# Altium PCB Handle.PcbDoc
Units mm, origin at the board's own origin, x right, y up, seen from the top; angles counter-clockwise.
Board outline 100.08 x 133.75 mm, 2 copper layers (Top Layer, Bottom Layer); 6 components, 129 nets, 30 pads, 0 vias.
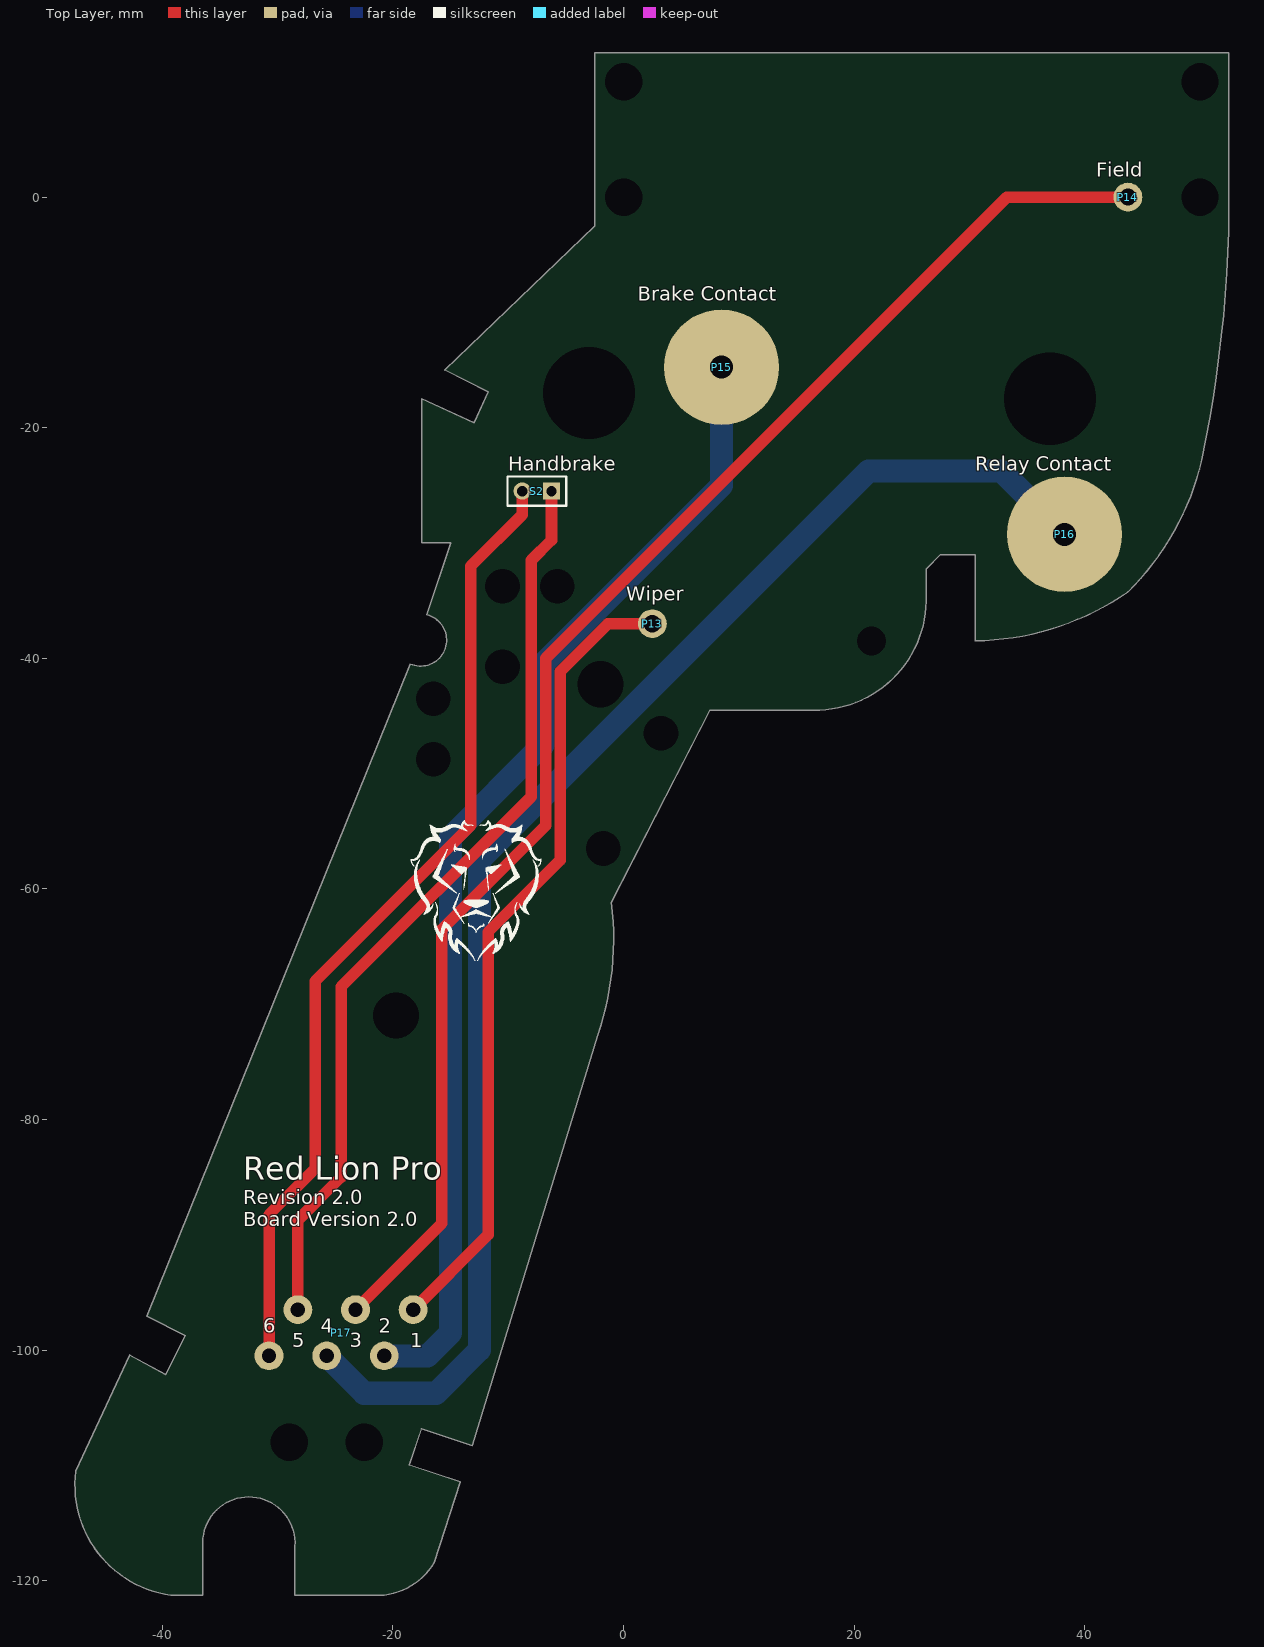
[diagram p0: Top Layer view]
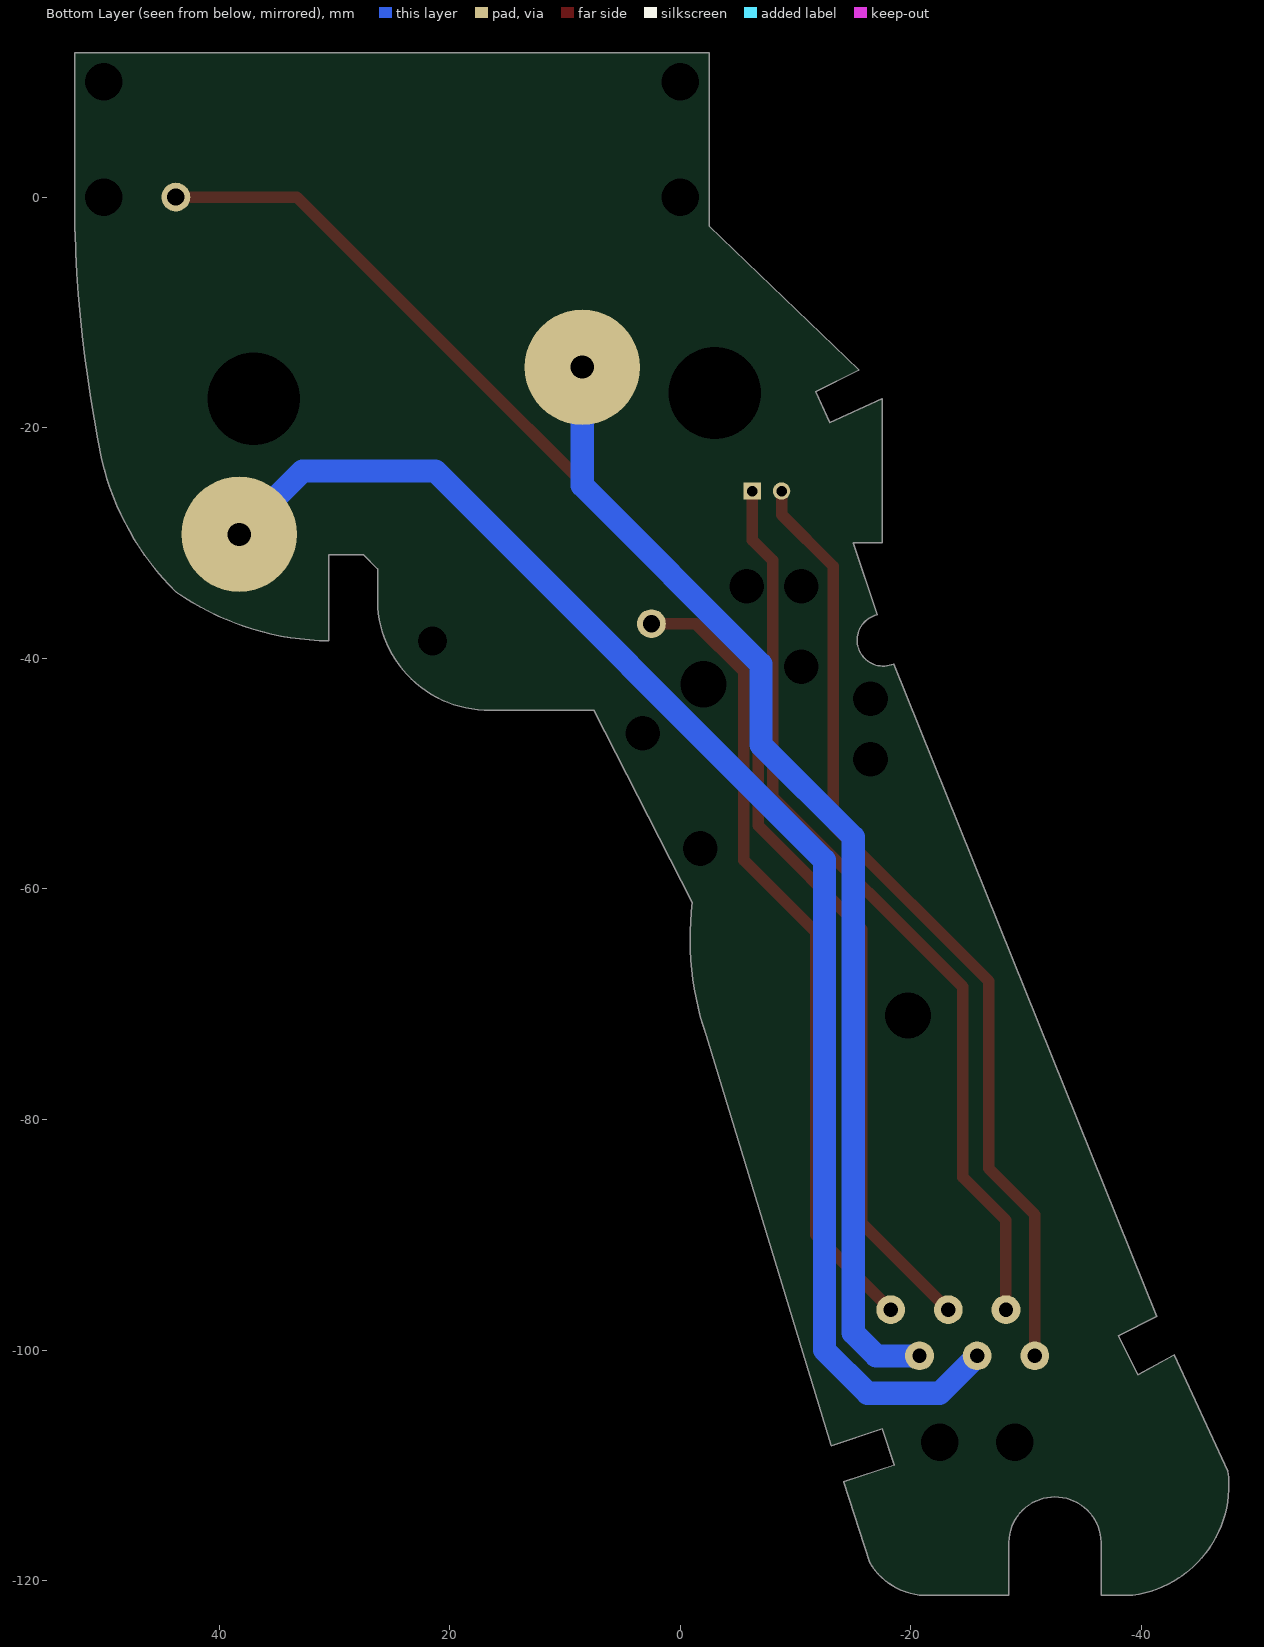
[diagram p1: Bottom Layer view, seen from below]

## Layer stack, top to bottom
Top Solder: solder mask 0.0102, Solder Resist, Dk 3.5
Top Layer: signal copper 0.0356
Dielectric 1: dielectric 0.32, FR-4, Dk 4.8
Bottom Layer: signal copper 0.0356
Bottom Solder: solder mask 0.0102, Solder Resist, Dk 3.5

## Board outline
-39.25,-121.25 -36.5,-121.25 -36.5,-117 cw(c-32.5,-116.75) -28.5,-117 -28.5,-121.25 -20.75,-121.25 ccw(c-21.421,-115.488) -16.421,-118.429 -14.167,-111.444 -18.575,-109.975 -17.525,-106.825 -13.111,-108.296 -2.234,-72.699 ccw(c-27.119,-64.323) -1.052,-61.178 7.5,-44.5 17,-44.5 ccw(c16.625,-34.875) 26.25,-34.5 26.25,-32.25 27.5,-31 30.5,-31 30.5,-38.5 ccw(c30.079,-14.408) 43.75,-34.25 ccw(c27.101,-17.417) 50.16,-22.789 ccw(c-62.76,0.581) 52.497,-2.992 52.5,-2.992 52.5,12.5 -2.5,12.5 -2.5,-2.5 -15.5,-15 -11.741,-16.88 -12.961,-19.563 -17.5,-17.5 -17.5,-30 -15,-30 -17.075,-36.225 cw(c-17.605,-38.423) -18.5,-40.5 -41.34,-97.08 -38,-98.75 -39.692,-102.135 -42.838,-100.432 -47.5,-110.5 ccw(c-38,-111.75)

## Design rules (kind name [scope] priority, off if disabled: settings)
Clearance [All] p1: gap=0.254
PolygonConnect [All] p1: connectstyle=Relief reliefconductorwidth=0.254 reliefentries=4 polygonreliefangle="90 Angle" airgapwidth=0.254
RoutingVias [All] p1: holewidth=0.711 width=1.27 viastyle="Through Hole" minholewidth=0.711 minwidth=1.27 maxholewidth=0.711 maxwidth=1.27
SolderMaskExpansion [All] p1: expansion=0.102
Width [All] p1: maxlimit=85 minlimit=0.01 preferedwidth=0.254
30 further rules are at their usual default settings.

## Classes and differential pairs
component class Handle: P13 P15 P16 P17 S2

## Components (designator, comment, footprint, x,y, rotation, side; value= is the part's Value field where it differs from the comment)
P13 "Wiper" 1Pin#1 2.5,-37 r0 top
P14 "Field" 1Pin#1 43.75,0 r0 top
P15 "Brake" 1Pin#2 7,-12.5 r0 top
P16 "Relay" 1Pin#3 39.5,-27.75 r0 top
P17 "Header 6" Interconnect -18.25,-96.5 r270 top
S2 "Full Stop" HDR1X2 -6.25,-25.5 r180 top

## Footprints (in the part's own frame and the unit in brackets; to place one, negate y for a bottom-side part, rotate by r counter-clockwise, add the part's x,y. Pads: shape width x height; smd on the part's side, far side on the other; paste and mask are expansions set on the pad)
1Pin#1 [mm]
  round 2.5 hole 1.5: 1(0,0)
1Pin#2 [mm]
  round 10 hole 2: 1(1.5,-2.25)
1Pin#3 [mm]
  round 10 hole 2: 1(-1.25,-1.5)
HDR1X2 [mm] "Connector; Header; 2 Position"
  rect 1.5x1.5 hole 0.9: 1(0,0)
  round 1.5 hole 0.9: 2(2.54,0)
  silkscreen extent -1.27,-1.27 3.81,1.27
Interconnect [mm]
  round 2.5 / inner round 1.524 / far side round 2.5 hole 1.25: 1(0,0) 2(4,-2.5) 3(0,-5) 4(4,-7.5) 5(0,-10) 6(4,-12.5)

## Part data
P13 P15 P16: library part Component_1
P14: library part 1Pin
P17: "Header, 6-Pin"
S2: library part SW-SPST, "Single-Pole, Single-Throw Switch"

## Free pads (board coordinates)
  round 1.5 hole 8: 0(37,-17.5) 1(-3,-17)
  round 1.5 hole 3.25: 3(0,0) 4(50,0) 5(50,10) 6(0,10)
  round 1.5 hole 2.5: 7(21.5,-38.5)
  round 1.5 hole 4: 8(-2,-42.25) 11(-19.75,-71)
  round 1.5 hole 3: 12(-16.5,-43.5) 13(-10.5,-40.75) 14(-16.5,-48.75) 15(-10.5,-33.75)
  round 2.5 hole 3.25: 20(-22.5,-108) 21(-29,-108)
  round 0 hole 3: 22(-5.75,-33.75) 23(3.25,-46.5) 24(-1.75,-56.5)

## Nets (pads, with @x,y where several pads share a name; then routed paths per layer and width w, separated by ;. In a path a pad name is that pad's centre, name@x,y a point inside that pad or via, vN(x,y) a via of type N, cw(c..) or ccw(c..) an arc to the next point about the centre after c; other vN are vias at no path point)
+5V: 
GND: 
NetD1_1: 
NetD1_2: 
NetD2_1: 
NetD2_2: 
NetD3_1: 
NetD3_2: 
NetD4_1: 
NetD4_2: 
NetD5_1: 
NetD5_2: 
NetD6_2: 
NetD8_1: 
NetD10_1: 
NetD12_2: 
NetD13_2: 
NetD14_2: 
NetD15_1: 
NetD16_2: 
NetD17_1: 
NetD18_1: 
NetD19_1: 
NetD20_1: 
NetD21_1: 
NetD22_1: 
NetDP1_1: 
NetDP1_2: 
NetDP1_3: 
NetDP1_4: 
NetDP1_5: 
NetDP1_7: 
NetDP1_8: 
NetDP1_9: 
NetDP1_10: 
NetDP1_11: 
NetDP1_12: 
NetP1_3: 
NetP2_1: 
NetP2_3: 
NetP3_1: 
NetP4_1: 
NetP4_4: 
NetP5_1: 
NetP5_2: 
NetP5_3: 
NetP5_4: 
NetP6_2: 
NetP6_3: 
NetP6_4: 
NetP8_2: 
NetP9_1: 
NetP9_3: 
NetP9_4: 
NetP9_5: 
NetP10_2: 
NetP11_1: P14.1 P17.3 | length 130.4
  Top Layer w1: P17.3 -15.75,-89 -15.75,-63.5 -6.754,-54.504 -6.754,-40.004 33.25,0 P14.1
NetP11_2: 
NetP11_3: 
NetP11_4: 
NetP11_5: 
NetP11_6: 
NetP11_7: 
NetP11_8: 
NetP11_9: 
NetP11_10: 
NetP11_11: 
NetP11_12: 
NetP11_13: 
NetP11_14: 
NetP11_15: 
NetP11_16: 
NetP11_17: 
NetP11_18: 
NetP11_19: 
NetP11_20: 
NetP11_21: 
NetP11_22: 
NetP11_23: 
NetP11_24: 
NetP11_25: 
NetP11_26: 
NetP12_1: 
NetP12_2: 
NetP12_3: 
NetP12_4: 
NetP12_5: 
NetP12_6: 
NetP12_7: 
NetP12_8: 
NetP12_9: 
NetP12_10: 
NetP12_11: 
NetP12_12: 
NetP12_13: 
NetP12_14: 
NetP12_15: 
NetP12_16: 
NetP12_17: 
NetP12_18: 
NetP12_19: 
NetP12_20: 
NetP12_21: 
NetP12_22: 
NetP12_23: 
NetP12_24: 
NetP12_25: 
NetP12_26: 
NetP13_1: P13.1 P17.1 | length 70.4
  Top Layer w1: P17.1 -11.75,-90 -11.75,-63.75 -5.5,-57.5 -5.5,-41.148 -1.352,-37 P13.1
NetP15_1: P15.1 P17.2 | length 100.1
  Bottom Layer w2: P17.2 -17,-100.5 -15.004,-98.504 -15.004,-55.504 -7,-47.5 -7,-40.5 8.5,-25 P15.1
NetP16_1: P16.1 P17.4 | length 126.2
  Bottom Layer w2: P17.4 -22.5,-103.75 -16.25,-103.75 -12.5,-100 -12.5,-57.5 21.25,-23.75 32.75,-23.75 P16.1 P16.1@38.75,-29.25
NetP17_5: P17.5 S2.1 | length 80.1
  Top Layer w1: P17.5 -28.25,-88.75 -24.5,-85 -24.5,-68.5 -8.008,-52.008 -8.008,-31.508 -6.25,-29.75 S2.1
NetP17_6: P17.6 S2.2 | length 84.1
  Top Layer w1: P17.6 -30.75,-88.25 -26.75,-84.25 -26.75,-68 -13.25,-54.5 -13.25,-32 -8.79,-27.54 S2.2
NetQ2_1: 
NetQ3_1: 
NetQ4_1: 
NetQ5_1: 
NetR5_1: 
NetR6_1: 
NetR8_1: 
NetR12_2: 
NetR12_3: 
NetR12_4: 
NetR13_1: 
NetR13_2: 
NetR13_3: 
NetR13_4: 
NetRE1_6: 
V+: 

## Silkscreen, mask and mechanical layers (free items; w line width, h text height)
Top Overlay:
  drawing of 2494 lines, arcs and shapes, not listed
  text "Field" at 41,1.75 h1.25
  text "Brake Contact" at 1.25,-9 h1.25
  text "Handbrake" at -10,-23.75 h1.25
  text "Relay Contact" at 30.5,-23.75 h1.25
  text "Wiper" at 0.25,-35 h1.25
  text "Red Lion Pro" at -33,-85.25 h2
  text "Revision 2.0 / Board Version 2.0" at -33,-89.25 h1.25
  text "6" at -31.25,-98.5 h1.25
  text "4" at -26.25,-98.5 h1.25
  text "2" at -21.25,-98.5 h1.25
  text "5" at -28.75,-99.75 h1.25
  text "3" at -23.75,-99.75 h1.25
  text "1" at -18.5,-99.75 h1.25
Mechanical 1:
  lines w0.254: 50.16,-22.789 cw(c27.101,-17.417) 43.75,-34.25 cw(c30.079,-14.408) 30.5,-38.5 30.5,-31 27.5,-31 26.25,-32.25 26.25,-34.5 cw(c16.625,-34.875) 17,-44.5 7.5,-44.5 -1.052,-61.178 cw(c-27.119,-64.323) -2.234,-72.699 -13.111,-108.296 -17.525,-106.825 -18.575,-109.975 -14.167,-111.444 -16.421,-118.429 cw(c-21.421,-115.488) -20.75,-121.25 -28.5,-121.25 -28.5,-117 ccw(c-32.5,-116.75) -36.5,-117 -36.5,-121.25 -39.25,-121.25 cw(c-38,-111.75) -47.5,-110.5 -42.838,-100.432 -39.692,-102.135 -38,-98.75 -41.34,-97.08 -18.5,-40.5 ccw(c-17.605,-38.423) -17.075,-36.225 -15,-30 -17.5,-30 -17.5,-17.5 -12.961,-19.563 -11.741,-16.88 -15.5,-15 -2.5,-2.5 -2.5,12.5 52.5,12.5 52.5,-2.992 ; 50.16,-22.789 ccw(c-62.76,0.581) 52.497,-2.992